# EAGLE board CT_schematic (EAGLE 7.6.0)

Size 100 x 80 mm. Coordinates in mm from the lower left corner, seen from the top.
Outline: 0,0 100,0 100,80 0,80 0,0
Copper layers (1*16): Top 0.035mm / dielectric 1.5mm / Bottom 0.035mm
Design rules "default": minimum track width 10mil, minimum drill 24mil, track to track 8mil, track to pad 8mil, pad to pad 8mil, via to via 8mil, smd to smd 8mil, copper to edge 40mil, drill to drill 8mil, minimum pad ring 10mil, minimum via ring 8mil, stop-mask expansion 4mil, vias tented up to drill 0mil, thermal gap 10mil

## Footprints (pad centres in the part's own frame; a part is rotated, then mirrored left to right if it is on the bottom)
C0603 = smd 0.8 x 0.8: 1 -0.762,0; 2 0.762,0
C0402 = smd 0.5 x 0.5: 1 -0.508,0; 2 0.508,0
R0603 = smd 0.8 x 0.8: 1 -0.762,0; 2 0.762,0
C0805 = smd 1.2 x 1.3: 1 -1.016,0; 2 1.016,0
C1210 = smd 1.2 x 2.5: 1 -1.524,0; 2 1.524,0
EXV-9H = smd 3.505 x 1.676: 1 -2.857,0; 2 2.857,0
L0603 = smd 0.8 x 0.8: 1 -0.762,0; 2 0.762,0
IND25X25CZ = smd 2.489 x 3.429: 1 -2.718,0; 2 2.718,0
PJ-037B_PACKAGE = drill 3.7 square: 1 12,0 | drill 3.2 square: 2 6,0
UFBGA176_25 = smd 0.3 x 0.3: A1 -4.55,4.55; A2 -3.9,4.55; A3 -3.25,4.55; A4 -2.6,4.55; A5 -1.95,4.55; A6 -1.3,4.55; A7 -0.65,4.55; A8 0,4.55; A9 0.65,4.55; A10 1.3,4.55; A11 1.95,4.55; A12 2.6,4.55; A13 3.25,4.55; A14 3.9,4.55; A15 4.55,4.55; B1 -4.55,3.9; B2 -3.9,3.9; B3 -3.25,3.9; B4 -2.6,3.9; B5 -1.95,3.9; B6 -1.3,3.9; B7 -0.65,3.9; B8 0,3.9; B9 0.65,3.9; B10 1.3,3.9; B11 1.95,3.9; B12 2.6,3.9; B13 3.25,3.9; B14 3.9,3.9; B15 4.55,3.9; C1 -4.55,3.25; C2 -3.9,3.25; C3 -3.25,3.25; C4 -2.6,3.25; C5 -1.95,3.25; C6 -1.3,3.25; C7 -0.65,3.25; C8 0,3.25; C9 0.65,3.25; C10 1.3,3.25; C11 1.95,3.25; C12 2.6,3.25; C13 3.25,3.25; C14 3.9,3.25; C15 4.55,3.25; D1 -4.55,2.6; D2 -3.9,2.6; D3 -3.25,2.6; D4 -2.6,2.6; D5 -1.95,2.6; D6 -1.3,2.6; D7 -0.65,2.6; D8 0,2.6; D9 0.65,2.6; D10 1.3,2.6; D11 1.95,2.6; D12 2.6,2.6; D13 3.25,2.6; D14 3.9,2.6; D15 4.55,2.6; E1 -4.55,1.95; E2 -3.9,1.95; E3 -3.25,1.95; E4 -2.6,1.95; E12 2.6,1.95; E13 3.25,1.95; E14 3.9,1.95; E15 4.55,1.95; F1 -4.55,1.3; F2 -3.9,1.3; F3 -3.25,1.3; F4 -2.6,1.3; F6 -1.3,1.3; F7 -0.65,1.3; F8 0,1.3; F9 0.65,1.3; F10 1.3,1.3; F12 2.6,1.3; F13 3.25,1.3; F14 3.9,1.3; F15 4.55,1.3; G1 -4.55,0.65; G2 -3.9,0.65; G3 -3.25,0.65; G4 -2.6,0.65; G6 -1.3,0.65; G7 -0.65,0.65; G8 0,0.65; G9 0.65,0.65; G10 1.3,0.65; G12 2.6,0.65; G13 3.25,0.65; G14 3.9,0.65; G15 4.55,0.65; H1 -4.55,0; H2 -3.9,0; H3 -3.25,0; H4 -2.6,0; H6 -1.3,0; H7 -0.65,0; H8 0,0; H9 0.65,0; H10 1.3,0; H12 2.6,0; H13 3.25,0; H14 3.9,0; H15 4.55,0; J1 -4.55,-0.65; J2 -3.9,-0.65; J3 -3.25,-0.65; J4 -2.6,-0.65; J6 -1.3,-0.65; J7 -0.65,-0.65; J8 0,-0.65; J9 0.65,-0.65; J10 1.3,-0.65; J12 2.6,-0.65; J13 3.25,-0.65; J14 3.9,-0.65; J15 4.55,-0.65; K1 -4.55,-1.3; K2 -3.9,-1.3; K3 -3.25,-1.3; K4 -2.6,-1.3; K6 -1.3,-1.3; K7 -0.65,-1.3; K8 0,-1.3; K9 0.65,-1.3; K10 1.3,-1.3; K12 2.6,-1.3; K13 3.25,-1.3; K14 3.9,-1.3; K15 4.55,-1.3; L1 -4.55,-1.95; L2 -3.9,-1.95; L3 -3.25,-1.95; L4 -2.6,-1.95; L12 2.6,-1.95; L13 3.25,-1.95; L14 3.9,-1.95; L15 4.55,-1.95; M1 -4.55,-2.6; M2 -3.9,-2.6; M3 -3.25,-2.6; M4 -2.6,-2.6; M5 -1.95,-2.6; M6 -1.3,-2.6; M7 -0.65,-2.6; M8 0,-2.6; M9 0.65,-2.6; M10 1.3,-2.6; M11 1.95,-2.6; M12 2.6,-2.6; M13 3.25,-2.6; M14 3.9,-2.6; M15 4.55,-2.6; N1 -4.55,-3.25; N2 -3.9,-3.25; N3 -3.25,-3.25; N4 -2.6,-3.25; N5 -1.95,-3.25; N6 -1.3,-3.25; N7 -0.65,-3.25; N8 0,-3.25; N9 0.65,-3.25; N10 1.3,-3.25; N11 1.95,-3.25; N12 2.6,-3.25; N13 3.25,-3.25; N14 3.9,-3.25; N15 4.55,-3.25; P1 -4.55,-3.9; P2 -3.9,-3.9; P3 -3.25,-3.9; P4 -2.6,-3.9; P5 -1.95,-3.9; P6 -1.3,-3.9; P7 -0.65,-3.9; P8 0,-3.9; P9 0.65,-3.9; P10 1.3,-3.9; P11 1.95,-3.9; P12 2.6,-3.9; P13 3.25,-3.9; P14 3.9,-3.9; P15 4.55,-3.9; R1 -4.55,-4.55; R2 -3.9,-4.55; R3 -3.25,-4.55; R4 -2.6,-4.55; R5 -1.95,-4.55; R6 -1.3,-4.55; R7 -0.65,-4.55; R8 0,-4.55; R9 0.65,-4.55; R10 1.3,-4.55; R11 1.95,-4.55; R12 2.6,-4.55; R13 3.25,-4.55; R14 3.9,-4.55; R15 4.55,-4.55
SOIC-8 = smd 1.6 x 0.6: 1 -2.7,1.905 | smd 1.55 x 0.6: 2 -2.7,0.635; 3 -2.7,-0.635; 4 -2.7,-1.905; 5 2.7,-1.905; 6 2.7,-0.635; 7 2.7,0.635; 8 2.7,1.905
VFBGA-63 = smd 0.4 x 0.4: A1 -3.6,4.4; A2 -2.8,4.4; A9 2.8,4.4; A10 3.6,4.4; B1 -3.6,3.6; B9 2.8,3.6; B10 3.6,3.6; C3 -2,2.8; C4 -1.2,2.8; C5 -0.4,2.8; C6 0.4,2.8; C7 1.2,2.8; C8 2,2.8; D3 -2,2; D4 -1.2,2; D5 -0.4,2; D6 0.4,2; D7 1.2,2; D8 2,2; E3 -2,1.2; E4 -1.2,1.2; E5 -0.4,1.2; E6 0.4,1.2; E7 1.2,1.2; E8 2,1.2; F3 -2,0.4; F4 -1.2,0.4; F5 -0.4,0.4; F6 0.4,0.4; F7 1.2,0.4; F8 2,0.4; G3 -2,-0.4; G4 -1.2,-0.4; G5 -0.4,-0.4; G6 0.4,-0.4; G7 1.2,-0.4; G8 2,-0.4; H3 -2,-1.2; H4 -1.2,-1.2; H5 -0.4,-1.2; H6 0.4,-1.2; H7 1.2,-1.2; H8 2,-1.2; J3 -2,-2; J4 -1.2,-2; J5 -0.4,-2; J6 0.4,-2; J7 1.2,-2; J8 2,-2; K3 -2,-2.8; K4 -1.2,-2.8; K5 -0.4,-2.8; K6 0.4,-2.8; K7 1.2,-2.8; K8 2,-2.8; L1 -3.6,-3.6; L2 -2.8,-3.6; L9 2.8,-3.6; L10 3.6,-3.6; M1 -3.6,-4.4; M2 -2.8,-4.4; M9 2.8,-4.4; M10 3.6,-4.4
QFN-32 = smd 0.6 x 0.3: 1 -2.3,1.75; 2 -2.3,1.25; 3 -2.3,0.75; 4 -2.3,0.25; 5 -2.3,-0.25; 6 -2.3,-0.75; 7 -2.3,-1.25; 8 -2.3,-1.75; 17 2.3,-1.75; 18 2.3,-1.25; 19 2.3,-0.75; 20 2.3,-0.25; 21 2.3,0.25; 22 2.3,0.75; 23 2.3,1.25; 24 2.3,1.75 | smd 0.3 x 0.6: 9 -1.75,-2.3; 10 -1.25,-2.3; 11 -0.75,-2.3; 12 -0.25,-2.3; 13 0.25,-2.3; 14 0.75,-2.3; 15 1.25,-2.3; 16 1.75,-2.3; 25 1.75,2.3; 26 1.25,2.3; 27 0.75,2.3; 28 0.25,2.3; 29 -0.25,2.3; 30 -0.75,2.3; 31 -1.25,2.3; 32 -1.75,2.3 | smd 3.2 x 3.2: EXP 0,0
SJ-43515TS-SMT-TR = smd 2.2 x 3: 1 0.6,-7.4; 4 3.4,-7.4 | smd 3 x 3: 2 12.8,-7.4; 5 17,-3 | smd 2 x 3: 3 5.3,0; 6 2.5,0 | drill 1.8: P$7 4.5,-3.69; P$8 11.54,-3.69
WM-64PC = drill 0.6 pad 1: 1 -1,0.95; 2 -1,-0.95
QFN-24 = smd 0.7 x 0.305: 1 -1.815,1.25; 2 -1.815,0.75; 3 -1.815,0.25; 4 -1.815,-0.25; 5 -1.815,-0.73; 6 -1.815,-1.25; 13 1.815,-1.25; 14 1.815,-0.75; 15 1.815,-0.25; 16 1.815,0.25; 17 1.815,0.75; 18 1.815,1.25 | smd 0.305 x 0.7: 7 -1.25,-1.815; 8 -0.75,-1.815; 9 -0.25,-1.815; 10 0.25,-1.815; 11 0.75,-1.815; 12 1.25,-1.815; 19 1.25,1.815; 20 0.75,1.815; 21 0.25,1.815; 22 -0.25,1.815; 23 -0.75,1.815; 24 -1.25,1.815 | smd 2.591 x 2.591: 25 0,0
USB-A-H = drill 0.914: 1 2.718,3.493; 2 2.718,1.003; 3 2.718,-1.003; 4 2.718,-3.493 | drill 2.311: 5 0,-6.566; 6 0,6.566
SOT143B = smd 1 x 0.7: 1 -0.75,-1 | smd 0.6 x 0.7: 2 0.95,-1; 3 0.95,1; 4 -0.95,1
SOT-23-6 = smd 1.1 x 0.6: 1 -1.4,0.95; 2 -1.4,0; 3 -1.4,-0.95; 4 1.4,-0.95; 5 1.4,0; 6 1.4,0.95
ABLS-25.000MHZ-B2F-T = smd 5.6 x 2.8: 1 -3.81,0; 2 5.69,0
ASEK = smd 1.4 x 1: 1 -1.1,-0.8; 2 1.1,-0.8; 3 1.1,0.8; 4 -1.1,0.8
ASFL1 = smd 1.7 x 1.5: 1 -1.27,-1.1; 2 1.27,-1.1; 3 1.27,1.1; 4 -1.27,1.1
IDT74FCT38072 = smd 0.51 x 1: 1 0,0; 2 1.27,0; 3 2.54,0; 4 3.81,0; 5 3.81,4.95; 6 2.54,4.95; 7 1.27,4.95; 8 0,4.95
WSON-8 = smd 0.3 x 0.6: 1 -0.75,0; 2 0.05,0; 3 0.85,0; 4 1.65,0; 5 1.65,3.8; 6 0.85,3.8; 7 0.05,3.8; 8 -0.75,3.8 | smd 3 x 2.6: PAD 0.45,1.9
IR3899MTR1PBF = smd 0.25 x 0.75: 1 0,0; 2 0.5,0; 3 1,0; 4 1.5,0; 5 2,0; 6 2.5,0; 7 3,0 | smd 0.75 x 0.25: 8 3.425,0.78; 9 3.425,1.28; 10 3.425,1.78; 14 -0.425,1.78; 15 -0.425,1.28; 16 -0.425,0.78 | smd 0.3 x 1.95: 11 3.22,3.63 | smd 1.62 x 2.42: 12 1.786,3.8 | smd 1 x 1.95: 13 0.117,3.63 | smd 2.19 x 1.25: 17 1.51,1.26
SON-6 = smd 0.55 x 0.3: 1 -0.355,0.5 | smd 0.52 x 0.3: 2 -0.37,0; 3 -0.37,-0.5; 4 0.37,-0.5; 5 0.37,0; 6 0.37,0.5
SW_4-1437565-2 = smd 1.4 x 2.1: 1 -2.23,4.55; 2 -2.23,-4.55; 3 2.23,4.55; 4 2.23,-4.55
LGM67K-G1J2-24-Z = smd 0.8 x 1.4: A -2,0; C 0,0
NC7SZ125M5X = smd 1.3 x 0.7: 1 -1.3,0.95; 2 -1.3,0; 3 -1.3,-0.95; 4 1.3,-0.95; 5 1.3,0.95

## Placement (x,y rotation side)
C1  1e-08  [C0603]  -19.05,87.63 0 top  (outside the outline)
C2  1e-06  [C0603]  -22.86,87.63 0 top  (outside the outline)
C3  2.2e-06  [C0603]  -80.01,82.55 0 top  (outside the outline)
C4  2.2e-06  [C0603]  -83.82,82.55 0 top  (outside the outline)
C5  1e-11  [C0402]  -41.91,97.79 0 top  (outside the outline)
C6  1e-11  [C0402]  -45.72,97.79 0 top  (outside the outline)
C7  1e-06  [C0603]  -26.67,87.63 0 top  (outside the outline)
C8  1e-07  [C0603]  -30.48,87.63 0 top  (outside the outline)
C9  1e-07  [C0603]  -34.29,87.63 0 top  (outside the outline)
C10  1e-07  [C0603]  -38.1,87.63 0 top  (outside the outline)
C11  1e-07  [C0603]  -41.91,87.63 0 top  (outside the outline)
C12  1e-07  [C0603]  -45.72,87.63 0 top  (outside the outline)
C13  1e-07  [C0603]  -49.53,87.63 0 top  (outside the outline)
C14  1e-07  [C0603]  -53.34,87.63 0 top  (outside the outline)
C15  1e-07  [C0603]  -57.15,87.63 0 top  (outside the outline)
C16  1e-07  [C0603]  -60.96,87.63 0 top  (outside the outline)
C17  1e-07  [C0603]  -64.77,87.63 0 top  (outside the outline)
C18  1e-07  [C0603]  -68.58,87.63 0 top  (outside the outline)
C19  1e-07  [C0603]  -72.39,87.63 0 top  (outside the outline)
C20  1e-07  [C0603]  -76.2,87.63 0 top  (outside the outline)
C21  1e-07  [C0603]  -80.01,87.63 0 top  (outside the outline)
C22  1e-07  [C0603]  -83.82,87.63 0 top  (outside the outline)
C23  4.7e-06  [C0603]  -87.63,82.55 0 top  (outside the outline)
C24  1e-08  [C0402]  -49.53,97.79 0 top  (outside the outline)
C25  1e-07  [C0402]  -53.34,97.79 0 top  (outside the outline)
C26  1e-07  [C0402]  -57.15,97.79 0 top  (outside the outline)
C27  1e-07  [C0402]  -60.96,97.79 0 top  (outside the outline)
C28  1e-07  [C0402]  -64.77,97.79 0 top  (outside the outline)
C29  2.2e-06  [C0603]  -91.44,82.55 0 top  (outside the outline)
C30  1e-06  [C0603]  -87.63,87.63 0 top  (outside the outline)
C31  1e-06  [C0603]  -91.44,87.63 0 top  (outside the outline)
C32  1e-06  [C0603]  -95.25,87.63 0 top  (outside the outline)
C33  1e-06  [C0603]  -99.06,87.63 0 top  (outside the outline)
C34  1e-06  [C0603]  -15.24,92.71 0 top  (outside the outline)
C35  1e-06  [C0603]  -19.05,92.71 0 top  (outside the outline)
C36  1e-06  [C0603]  -22.86,92.71 0 top  (outside the outline)
C37  1e-07  [C0402]  -68.58,97.79 0 top  (outside the outline)
C38  1e-07  [C0402]  -72.39,97.79 0 top  (outside the outline)
C39  1e-07  [C0402]  -76.2,97.79 0 top  (outside the outline)
C40  1e-07  [C0402]  -80.01,97.79 0 top  (outside the outline)
C41  1e-06  [C0603]  -26.67,92.71 0 top  (outside the outline)
C42  1e-06  [C0603]  -30.48,92.71 0 top  (outside the outline)
C43  1e-06  [C0603]  -34.29,92.71 0 top  (outside the outline)
C44  1e-06  [C0603]  -38.1,92.71 0 top  (outside the outline)
C45  1e-06  [C0603]  -41.91,92.71 0 top  (outside the outline)
C46  1e-06  [C0603]  -45.72,92.71 0 top  (outside the outline)
C47  1e-06  [C0603]  -49.53,92.71 0 top  (outside the outline)
C48  1e-06  [C0603]  -53.34,92.71 0 top  (outside the outline)
C49  1e-07  [C0402]  -83.82,97.79 0 top  (outside the outline)
C50  1e-07  [C0402]  -87.63,97.79 0 top  (outside the outline)
C51  1e-07  [C0402]  -91.44,97.79 0 top  (outside the outline)
C52  1e-07  [C0402]  -95.25,97.79 0 top  (outside the outline)
C53  1e-06  [C0603]  -57.15,92.71 0 top  (outside the outline)
C54  1e-08  [C0402]  -99.06,97.79 0 top  (outside the outline)
C55  2.2e-06  [C0603]  -95.25,82.55 0 top  (outside the outline)
C56  1e-08  [C0402]  -102.87,97.79 0 top  (outside the outline)
C57  1e-08  [C0402]  -15.24,102.87 0 top  (outside the outline)
C58  0.0001  [R0603]  -60.96,92.71 0 top  (outside the outline)
C59  1e-08  [C0402]  -19.05,102.87 0 top  (outside the outline)
C60  1e-08  [C0402]  -22.86,102.87 0 top  (outside the outline)
C61  1e-08  [C0402]  -26.67,102.87 0 top  (outside the outline)
C62  1e-08  [C0402]  -30.48,102.87 0 top  (outside the outline)
C63  8e-07  [R0603]  -64.77,92.71 0 top  (outside the outline)
C64  1e-05  [C0805]  -34.29,76.2 0 top  (outside the outline)
C65  0.0001  [C1210]  -87.63,68.58 0 top  (outside the outline)
C66  2.2e-06  [C0603]  -99.06,82.55 0 top  (outside the outline)
C67  1e-07  [C0402]  -34.29,102.87 0 top  (outside the outline)
C68  1e-07  [C0402]  -38.1,102.87 0 top  (outside the outline)
C69  7.7470032193169e-09  [R0603]  -44.45,76.2 0 top  (outside the outline)
C70  2.7e-07  [C0603]  -15.24,87.63 0 top  (outside the outline)
C73  1e-08  [C0402]  -41.91,102.87 0 top  (outside the outline)
C74  1e-05  [C1210]  -93.98,68.58 0 top  (outside the outline)
C75  1e-05  [C1210]  -100.33,68.58 0 top  (outside the outline)
C76  1e-07  [C0402]  -45.72,102.87 0 top  (outside the outline)
C77  0.0001  [EXV-9H]  -17.78,69.85 0 top  (outside the outline)
C78  0.0001  [EXV-9H]  -29.21,69.85 0 top  (outside the outline)
C79  1e-08  [C0402]  -49.53,102.87 0 top  (outside the outline)
C80  1e-08  [C0402]  -53.34,102.87 0 top  (outside the outline)
F1  240.0  [L0603]  -68.58,92.71 0 top  (outside the outline)
I1  6.8e-07  [IND25X25CZ]  -59.69,69.85 0 top  (outside the outline)
J1  PJ-037B  [PJ-037B_PACKAGE]  -55.88,38.1 0 top  (outside the outline)
R2  1000.0  [R0603]  -72.39,92.71 0 top  (outside the outline)
R4  4700.0  [R0603]  -76.2,92.71 0 top  (outside the outline)
R5  4700.0  [R0603]  -80.01,92.71 0 top  (outside the outline)
R6  10000.0  [R0603]  -90.17,76.2 0 top  (outside the outline)
R7  10000.0  [R0603]  -95.25,76.2 0 top  (outside the outline)
R8  10000.0  [R0603]  -100.33,76.2 0 top  (outside the outline)
R9  10000.0  [R0603]  -15.24,82.55 0 top  (outside the outline)
R10  10000.0  [R0603]  -20.32,82.55 0 top  (outside the outline)
R11  10000.0  [R0603]  -25.4,82.55 0 top  (outside the outline)
R12  10000.0  [R0603]  -30.48,82.55 0 top  (outside the outline)
R13  10000.0  [R0603]  -35.56,82.55 0 top  (outside the outline)
R14  10000.0  [R0603]  -40.64,82.55 0 top  (outside the outline)
R15  10000.0  [R0603]  -45.72,82.55 0 top  (outside the outline)
R16  1270.0  [R0603]  -83.82,92.71 0 top  (outside the outline)
R17  1270.0  [R0603]  -87.63,92.71 0 top  (outside the outline)
R18  1270.0  [R0603]  -91.44,92.71 0 top  (outside the outline)
R19  1270.0  [R0603]  -95.25,92.71 0 top  (outside the outline)
R20  47000.0  [R0603]  -50.8,82.55 0 top  (outside the outline)
R21  8060.0  [R0603]  -99.06,92.71 0 top  (outside the outline)
R22  100000.0  [R0603]  -64.77,76.2 0 top  (outside the outline)
R23  36000.0  [R0603]  -55.88,82.55 0 top  (outside the outline)
R24  100000.0  [R0603]  -69.85,76.2 0 top  (outside the outline)
R25  0.1  [R0603]  -15.24,97.79 0 top  (outside the outline)
R26  4030.2416170974  [R0603]  -52.07,76.2 0 top  (outside the outline)
R27  719.68600305311  [R0603]  -59.69,76.2 0 top  (outside the outline)
R28  68.0  [R0603]  -19.05,97.79 0 top  (outside the outline)
R29  130.0  [R0603]  -22.86,97.79 0 top  (outside the outline)
R30  39000.0  [R0603]  -60.96,82.55 0 top  (outside the outline)
R31  49900.0  [R0603]  -66.04,82.55 0 top  (outside the outline)
R32  5600.0  [R0603]  -26.67,97.79 0 top  (outside the outline)
R33  100000.0  [R0603]  -74.93,76.2 0 top  (outside the outline)
R34  3900.0  [R0603]  -30.48,97.79 0 top  (outside the outline)
R35  1000.0  [R0603]  -34.29,97.79 0 top  (outside the outline)
R36  10000.0  [R0603]  -71.12,82.55 0 top  (outside the outline)
R37  10000.0  [R0603]  -76.2,82.55 0 top  (outside the outline)
R38  9100.0  [R0603]  -38.1,97.79 0 top  (outside the outline)
R39  680000.0  [R0603]  -80.01,76.2 0 top  (outside the outline)
R40  120000.0  [R0603]  -85.09,76.2 0 top  (outside the outline)
U1  STM32F207IEH6  [UFBGA176_25]  -35.56,6.35 0 top  (outside the outline)
U2  AT25160B-SSHL-T  [SOIC-8]  -76.2,50.8 0 top  (outside the outline)
U3  mt29f4g08abadah4  [VFBGA-63]  -62.23,38.1 0 top  (outside the outline)
U4  SGTL5000XNAA3  [QFN-32]  -44.45,50.8 0 top  (outside the outline)
U5  SJ-43515TS-SMT-TR  [SJ-43515TS-SMT-TR]  -69.85,10.16 0 top  (outside the outline)
U6  SJ-43515TS-SMT-TR  [SJ-43515TS-SMT-TR]  -97.79,10.16 0 top  (outside the outline)
U7  SJ-43515TS-SMT-TR  [SJ-43515TS-SMT-TR]  -39.37,26.67 0 top  (outside the outline)
U8  WM-64PCT  [WM-64PC]  -20.32,50.8 0 top  (outside the outline)
U9  SGTL5000XNAA3  [QFN-32]  -59.69,50.8 0 top  (outside the outline)
U10  SJ-43515TS-SMT-TR  [SJ-43515TS-SMT-TR]  -67.31,26.67 0 top  (outside the outline)
U11  SJ-43515TS-SMT-TR  [SJ-43515TS-SMT-TR]  -95.25,26.67 0 top  (outside the outline)
U12  SJ-43515TS-SMT-TR  [SJ-43515TS-SMT-TR]  -39.37,40.64 0 top  (outside the outline)
U13  WM-64PCT  [WM-64PC]  -30.48,50.8 0 top  (outside the outline)
U14  USB3317C-CP-TR  [QFN-24]  -80.01,68.58 0 top  (outside the outline)
U15  61400416021  [USB-A-H]  -19.05,8.89 0 top  (outside the outline)
U16  prtr5v0u2ax  [SOT143B]  -66.04,102.87 0 top  (outside the outline)
U17  MAX4995AAUT+T  [SOT-23-6]  -16.51,76.2 0 top  (outside the outline)
U18  ABLS-25.000MHZ-B2F-T  [ABLS-25.000MHZ-B2F-T]  -48.26,69.85 0 top  (outside the outline)
U19  ASEK-32.768KHz-ECST  [ASEK]  -101.6,59.69 0 top  (outside the outline)
U20  ASFL-24.57MHZ-NCS  [ASFL1]  -46.99,60.96 0 top  (outside the outline)
U21  idt74fct38072  [IDT74FCT38072]  -83.82,57.15 0 top  (outside the outline)
U22  ASFL1-26MHZ-NCS  [ASFL1]  -63.5,60.96 0 top  (outside the outline)
U23  LP2951ACSDX/NOPB  [WSON-8]  -29.21,58.42 0 top  (outside the outline)
U24  IR3899MTR1PBF  [IR3899MTR1PBF]  -99.06,34.29 0 top  (outside the outline)
U25  LP3878SDX-ADJ/NOPB  [WSON-8]  -97.79,48.26 0 top  (outside the outline)
U26  TPS3895ADRYR  [SON-6]  -69.85,101.6 0 top  (outside the outline)
U27  4-1437565-2  [SW_4-1437565-2]  -82.55,38.1 0 top  (outside the outline)
U28  Q65110A2395  [LGM67K-G1J2-24-Z]  -68.58,68.58 0 top  (outside the outline)
U29  nc7sz125m5x  [NC7SZ125M5X]  -21.59,76.2 0 top  (outside the outline)
U30  nc7sz125m5x  [NC7SZ125M5X]  -27.94,76.2 0 top  (outside the outline)

## Library data of the parts
C1-C70 C73-C80 F1 I1 J1 R2 R4-R40 U1-U30 = circuit_tree

## Nets
CLK_CRYSTAL_U1_G1: C5.1 U1.G1 U18.1
CLK_CRYSTAL_U1_H1: C6.1 U1.H1 U18.2
CLK_U1_E1: U1.E1 U19.3
CLK_U4_21: U4.21 U21.7
CLK_U9_21: U9.21 U21.6
CLK_U14_23: U14.23 U22.3
CLK_U21_3: U20.3 U21.3
GND: C1.2 C2.2 C3.2 C4.2 C5.2 C6.2 C7.2 C8.2 C9.2 C10.2 C11.2 C12.2 C13.2 C14.2 C15.2 C16.2 C17.2 C18.2 C19.2 C20.2 C21.2 C22.2 C23.2 C24.2 C25.2 C26.2 C27.2 C28.2 C29.2 C37.2 C38.2 C39.2 C40.2 C41.2 C49.2 C50.2 C51.2 C52.2 C53.2 C54.2 C55.2 C56.2 C57.2 C58.2 C59.2 C60.2 C61.2 C62.2 C63.2 C64.2 C66.2 C67.2 C68.2 C73.2 C74.2 C75.2 C76.2 C77.2 C78.2 C79.2 C80.2 J1.2 R2.2 R6.2 R7.2 R17.2 R19.2 R20.2 R21.2 R24.2 R25.1 R25.2 R27.2 R30.2 R32.2 R35.2 R38.2 R40.2 U1.D5 U1.D7 U1.D8 U1.D9 U1.F2 U1.F6 U1.F7 U1.F8 U1.F9 U1.F10 U1.F12 U1.G2 U1.G6 U1.G7 U1.G8 U1.G9 U1.G10 U1.G12 U1.H6 U1.H7 U1.H8 U1.H9 U1.H10 U1.H12 U1.J6 U1.J7 U1.J8 U1.J9 U1.J10 U1.K6 U1.K7 U1.K8 U1.K9 U1.K10 U1.M1 U1.M8 U1.M9 U1.N1 U2.4 U3.C5 U3.F7 U3.K3 U3.K8 U4.1 U4.3 U4.7 U4.EXP U6.1 U7.1 U8.2 U9.1 U9.3 U9.7 U9.EXP U11.1 U12.1 U13.2 U14.1 U14.25 U15.4 U15.5 U15.6 U16.1 U17.2 U19.2 U20.2 U21.4 U21.5 U21.8 U22.2 U23.3 U23.4 U23.PAD U24.4 U24.11 U24.17 U25.3 U25.PAD U26.2 U28.C U29.1 U29.3 U30.1 U30.3
NET_U1_C5: U1.C5
NET_U1_D6: R6.1 U1.D6
NET_U1_F13: C4.1 U1.F13
NET_U1_J1: R4.1 U1.J1 U29.4
NET_U1_L4: R7.1 U1.L4
NET_U1_M10: C3.1 U1.M10
NET_U1_R1: C1.1 C2.1 F1.1 U1.P1 U1.R1
NET_U1_R14: U28.A
NET_U1_R15: U27.3 U27.4
NET_U2_3: R8.1 U2.3
NET_U2_7: R10.1 U2.7
NET_U3_C3: R15.1 U3.C3
NET_U4_10: C40.1 U4.10
NET_U4_29: R16.1 U4.29
NET_U4_31: R17.1 U4.31
NET_U5_1: U4.4 U5.1
NET_U5_2: U4.2 U5.2
NET_U5_5: U4.6 U5.5
NET_U6_2: C31.1 U6.2
NET_U6_5: C30.1 U6.5
NET_U6_11: C31.2
NET_U6_12: C30.2
NET_U7_2: C33.1 C34.1 U7.2
NET_U7_5: C32.1 U7.5
NET_U7_13: C33.2 C34.2
NET_U7_14: C32.2
NET_U8_1: C35.1 C36.1 C41.1 U4.16 U8.1
NET_U8_15: C35.2 C36.2
NET_U9_10: C52.1 U9.10
NET_U9_29: R18.1 U9.29
NET_U9_31: R19.1 U9.31
NET_U10_1: U9.4 U10.1
NET_U10_2: U9.2 U10.2
NET_U10_5: U9.6 U10.5
NET_U11_2: C43.1 U11.2
NET_U11_5: C42.1 U11.5
NET_U11_11: C43.2
NET_U11_12: C42.2
NET_U12_2: C45.1 C46.1 U12.2
NET_U12_5: C44.1 U12.5
NET_U12_13: C45.2 C46.2
NET_U12_14: C44.2
NET_U13_1: C47.1 C48.1 C53.1 U9.16 U13.1
NET_U13_15: C47.2 C48.2
NET_U14_4: C55.1 U14.4
NET_U14_22: R5.1 U14.22 U30.4
NET_U14_24: R21.1 U14.24
NET_U15_1: C58.1 U14.2 U15.1 U16.4 U17.1
NET_U15_2: U14.5 U15.2 U16.3
NET_U15_3: U14.6 U15.3 U16.2
NET_U17_3: R20.1 U17.3
NET_U17_4: U14.7 U17.4
NET_U23_5: R22.1 U23.5
NET_U23_7: R23.2 R24.1 U23.7
NET_U24_1: C69.1 R26.1 R27.1 R28.1 R29.1 U24.1 U24.8
NET_U24_2: C68.1 U24.2
NET_U24_3: C69.2 C70.1 C70.2 U24.3
NET_U24_5: R30.1 U24.5
NET_U24_10: C66.1 U24.10
NET_U24_12: C65.1 I1.1 U24.12
NET_U24_13: U24.13
NET_U24_14: C65.2 U24.14
NET_U24_15: R31.1 R32.1 U24.15
NET_U24_ATNET_3: I1.2 R26.2
NET_U24_ATNET_4: C70.2 R28.2
NET_U24_ATNET_5: R29.2
NET_U25_1: C73.1 U25.1
NET_U25_6: R34.2 R35.1 U25.6
NET_U25_8: R33.1 U25.8
NET_U26_1: R37.1 R38.1 U26.1
NET_U26_3: R39.2 R40.1 U26.3
NET_U26_4: R36.1 U26.4 U29.2 U30.2
NET_U27_1: R2.1 U27.1 U27.2
PROC_FSMC_A16: U1.N14 U3.D5
PROC_FSMC_A17: U1.N13 U3.C4
PROC_FSMC_D0: U1.M14 U3.H4
PROC_FSMC_D1: U1.L14 U3.J4
PROC_FSMC_D2: U1.B12 U3.K4
PROC_FSMC_D3: U1.C12 U3.K5
PROC_FSMC_D4: U1.R8 U3.K6
PROC_FSMC_D5: U1.P8 U3.J7
PROC_FSMC_D6: U1.P9 U3.K7
PROC_FSMC_D7: U1.R9 U3.J8
PROC_FSMC_INT3: R11.1 U1.J14 U3.C8
PROC_FSMC_NCE2: R12.1 U1.A11 U3.C6
PROC_FSMC_NOE: R14.1 U1.D10 U3.D4
PROC_FSMC_NWE: R13.1 U1.C11 U3.C7
PROC_I2S2_SCK: U1.D14 U4.24
PROC_I2S2_SD: U1.C13 U4.26
PROC_I2S2_WS: U1.B4 U4.23
PROC_I2S3_SCK: U1.B14 U9.24
PROC_I2S3_SD: U1.A12 U9.26
PROC_I2S3_WS: U1.A13 U9.23
PROC_SPI1_MISO: U1.A9 U2.2
PROC_SPI1_MOSI: U1.R3 U2.5
PROC_SPI1_NSS: R9.1 U1.N4 U2.1
PROC_SPI1_SCK: U1.A10 U2.6
PROC_USB_OTG_HS_ULPI_CK: U1.P4 U14.12
PROC_USB_OTG_HS_ULPI_D0: U1.R2 U14.16
PROC_USB_OTG_HS_ULPI_D1: U1.R5 U14.15
PROC_USB_OTG_HS_ULPI_D2: U1.R4 U14.14
PROC_USB_OTG_HS_ULPI_D3: U1.R12 U14.13
PROC_USB_OTG_HS_ULPI_D4: U1.R13 U14.11
PROC_USB_OTG_HS_ULPI_D5: U1.P12 U14.10
PROC_USB_OTG_HS_ULPI_D6: U1.P13 U14.9
PROC_USB_OTG_HS_ULPI_D7: U1.A6 U14.8
PROC_USB_OTG_HS_ULPI_DIR: U1.E4 U14.19
PROC_USB_OTG_HS_ULPI_NXT: U1.H4 U14.18
PROC_USB_OTG_HS_ULPI_STP: U1.M2 U14.20
VCC_S1_15V9: C63.1 C67.1 C74.1 C77.1 C78.1 J1.1 R31.2 R33.2 U23.8 U24.9 U25.4
VCC_TIER1_1V8: C37.1 C38.1 C49.1 C50.1 C57.1 C64.1 C79.1 C80.1 R22.2 R23.1 U4.5 U4.30 U9.5 U9.30 U14.21 U23.1 U29.5 U30.5
VCC_TIER1_3V3: C7.1 C8.1 C9.1 C10.1 C11.1 C12.1 C13.1 C14.1 C15.1 C16.1 C17.1 C18.1 C19.1 C20.1 C21.1 C22.1 C23.1 C24.1 C25.1 C26.1 C27.1 C28.1 C29.1 C39.1 C51.1 C54.1 C56.1 C59.1 C60.1 C61.1 C62.1 C76.1 F1.2 I1.2 R4.2 R5.2 R8.2 R9.2 R10.2 R11.2 R12.2 R13.2 R14.2 R15.2 R16.2 R18.2 R26.2 R36.2 R37.2 R39.1 U1.C1 U1.C5 U1.C7 U1.C8 U1.C9 U1.F3 U1.G3 U1.G13 U1.H13 U1.J12 U1.J13 U1.K4 U1.N8 U1.N9 U1.N10 U2.8 U3.D3 U3.G4 U3.H8 U3.J6 U4.20 U9.20 U14.3 U14.17 U19.4 U20.4 U21.1 U21.2 U22.4 U26.6
VCC_TIER1_5V0: C75.1 R34.1 U17.5 U25.5

## Tracks (layer width: path | path; a pad name or v marks a point on that pad's centre or on a via)
CLK_CRYSTAL_U1_G1  (2 unrouted)
CLK_CRYSTAL_U1_H1  (2 unrouted)
CLK_U1_E1  (1 unrouted)
CLK_U4_21  (1 unrouted)
CLK_U9_21  (1 unrouted)
CLK_U14_23  (1 unrouted)
CLK_U21_3  (1 unrouted)
GND  (161 unrouted)
NET_U1_D6  (1 unrouted)
NET_U1_F13  (1 unrouted)
NET_U1_J1  (2 unrouted)
NET_U1_L4  (1 unrouted)
NET_U1_M10  (1 unrouted)
NET_U1_R1  (4 unrouted)
NET_U1_R15  (1 unrouted)
NET_U2_3  (1 unrouted)
NET_U2_7  (1 unrouted)
NET_U3_C3  (1 unrouted)
NET_U4_10  (1 unrouted)
NET_U4_29  (1 unrouted)
NET_U4_31  (1 unrouted)
NET_U5_1  (1 unrouted)
NET_U5_2  (1 unrouted)
NET_U5_5  (1 unrouted)
NET_U6_2  (1 unrouted)
NET_U6_5  (1 unrouted)
NET_U7_2  (2 unrouted)
NET_U7_5  (1 unrouted)
NET_U7_13  (1 unrouted)
NET_U8_1  (4 unrouted)
NET_U8_15  (1 unrouted)
NET_U9_10  (1 unrouted)
NET_U9_29  (1 unrouted)
NET_U9_31  (1 unrouted)
NET_U10_1  (1 unrouted)
NET_U10_2  (1 unrouted)
NET_U10_5  (1 unrouted)
NET_U11_2  (1 unrouted)
NET_U11_5  (1 unrouted)
NET_U12_2  (2 unrouted)
NET_U12_5  (1 unrouted)
NET_U12_13  (1 unrouted)
NET_U13_1  (4 unrouted)
NET_U13_15  (1 unrouted)
NET_U14_4  (1 unrouted)
NET_U14_22  (2 unrouted)
NET_U14_24  (1 unrouted)
NET_U15_1  (4 unrouted)
NET_U15_2  (2 unrouted)
NET_U15_3  (2 unrouted)
NET_U17_3  (1 unrouted)
NET_U17_4  (1 unrouted)
NET_U23_5  (1 unrouted)
NET_U23_7  (2 unrouted)
NET_U24_1  (6 unrouted)
NET_U24_2  (1 unrouted)
NET_U24_3  (3 unrouted)
NET_U24_5  (1 unrouted)
NET_U24_10  (1 unrouted)
NET_U24_12  (2 unrouted)
NET_U24_14  (1 unrouted)
NET_U24_15  (2 unrouted)
NET_U24_ATNET_3  (1 unrouted)
NET_U24_ATNET_4  (1 unrouted)
NET_U25_1  (1 unrouted)
NET_U25_6  (2 unrouted)
NET_U25_8  (1 unrouted)
NET_U26_1  (2 unrouted)
NET_U26_3  (2 unrouted)
NET_U26_4  (3 unrouted)
NET_U27_1  (2 unrouted)
PROC_FSMC_A16  (1 unrouted)
PROC_FSMC_A17  (1 unrouted)
PROC_FSMC_D0  (1 unrouted)
PROC_FSMC_D1  (1 unrouted)
PROC_FSMC_D2  (1 unrouted)
PROC_FSMC_D3  (1 unrouted)
PROC_FSMC_D4  (1 unrouted)
PROC_FSMC_D5  (1 unrouted)
PROC_FSMC_D6  (1 unrouted)
PROC_FSMC_D7  (1 unrouted)
PROC_FSMC_INT3  (2 unrouted)
PROC_FSMC_NCE2  (2 unrouted)
PROC_FSMC_NOE  (2 unrouted)
PROC_FSMC_NWE  (2 unrouted)
PROC_I2S2_SCK  (1 unrouted)
PROC_I2S2_SD  (1 unrouted)
PROC_I2S2_WS  (1 unrouted)
PROC_I2S3_SCK  (1 unrouted)
PROC_I2S3_SD  (1 unrouted)
PROC_I2S3_WS  (1 unrouted)
PROC_SPI1_MISO  (1 unrouted)
PROC_SPI1_MOSI  (1 unrouted)
PROC_SPI1_NSS  (2 unrouted)
PROC_SPI1_SCK  (1 unrouted)
PROC_USB_OTG_HS_ULPI_CK  (1 unrouted)
PROC_USB_OTG_HS_ULPI_D0  (1 unrouted)
PROC_USB_OTG_HS_ULPI_D1  (1 unrouted)
PROC_USB_OTG_HS_ULPI_D2  (1 unrouted)
PROC_USB_OTG_HS_ULPI_D3  (1 unrouted)
PROC_USB_OTG_HS_ULPI_D4  (1 unrouted)
PROC_USB_OTG_HS_ULPI_D5  (1 unrouted)
PROC_USB_OTG_HS_ULPI_D6  (1 unrouted)
PROC_USB_OTG_HS_ULPI_D7  (1 unrouted)
PROC_USB_OTG_HS_ULPI_DIR  (1 unrouted)
PROC_USB_OTG_HS_ULPI_NXT  (1 unrouted)
PROC_USB_OTG_HS_ULPI_STP  (1 unrouted)
VCC_S1_15V9  (10 unrouted)
VCC_TIER1_1V8  (17 unrouted)
VCC_TIER1_3V3  (79 unrouted)
VCC_TIER1_5V0  (3 unrouted)